# Altium PCB PCB_prototype.PcbDoc
Units mm, origin at the board's own origin, x right, y up, seen from the top; angles counter-clockwise.
Board outline 35.05 x 27.18 mm, 2 copper layers (Top Layer, Bottom Layer); 4 components, 15 nets, 110 pads, 0 vias.
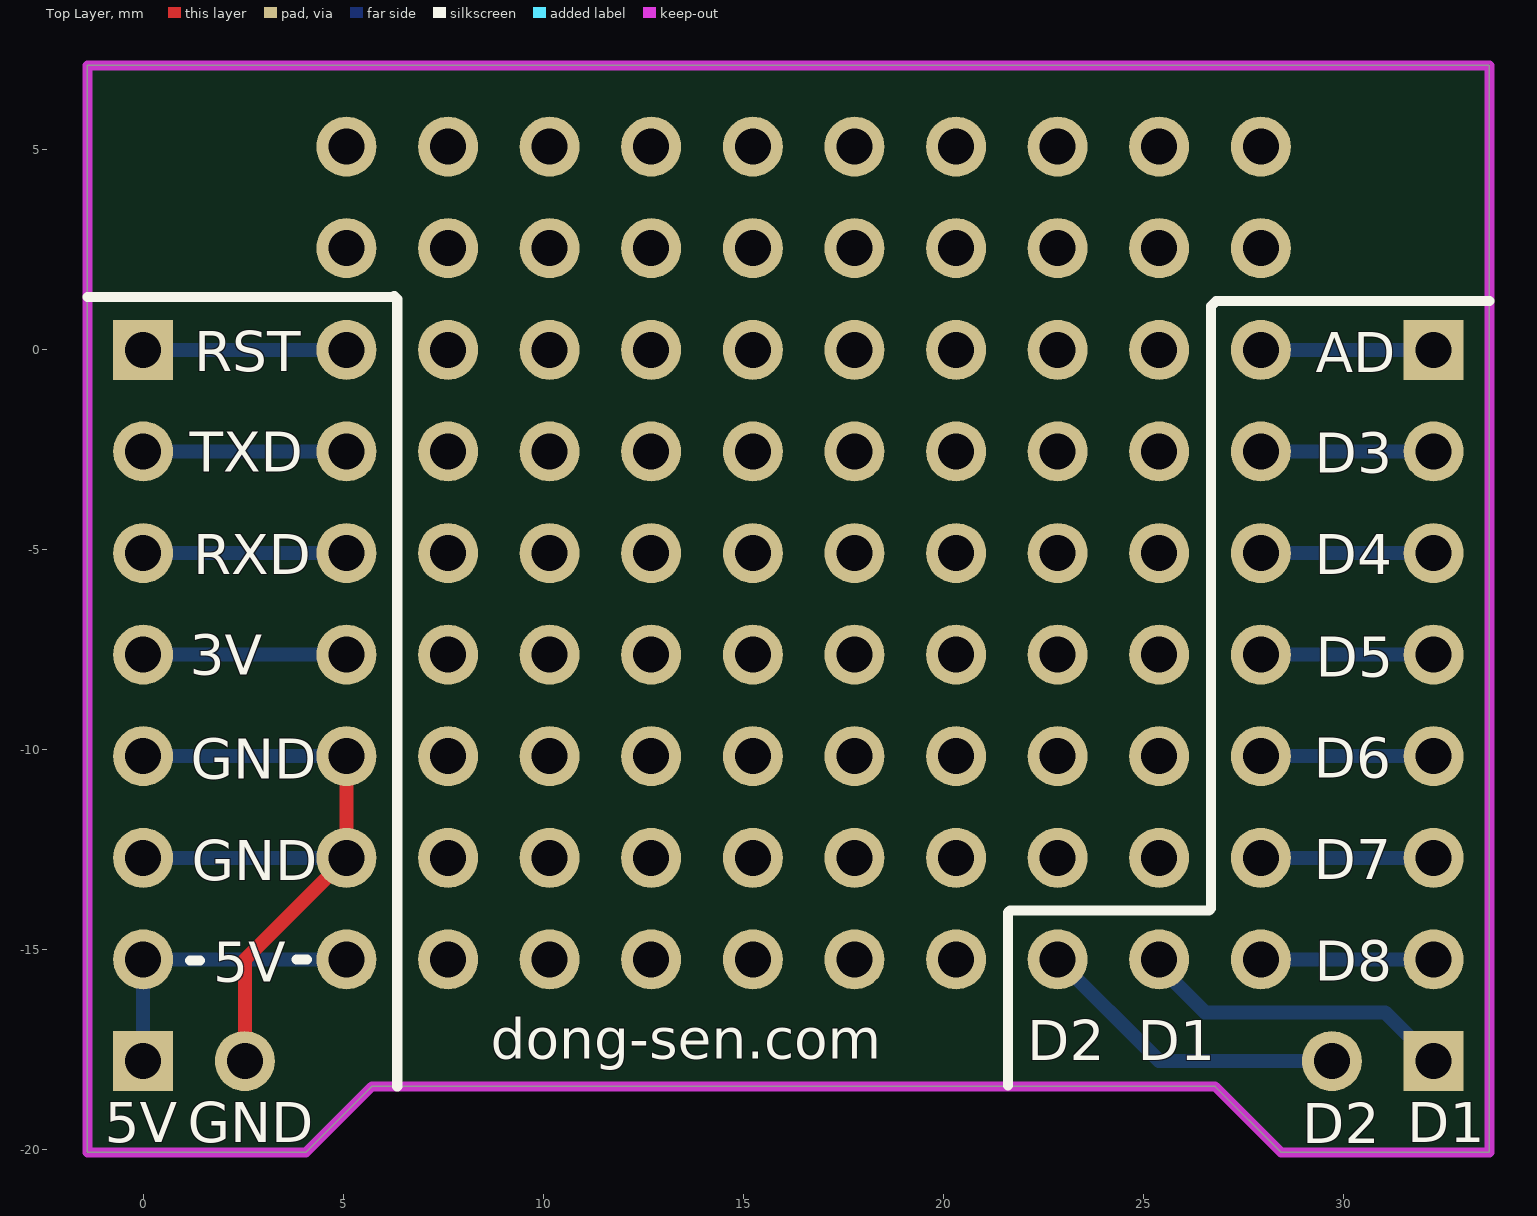
[diagram p0: Top Layer view]
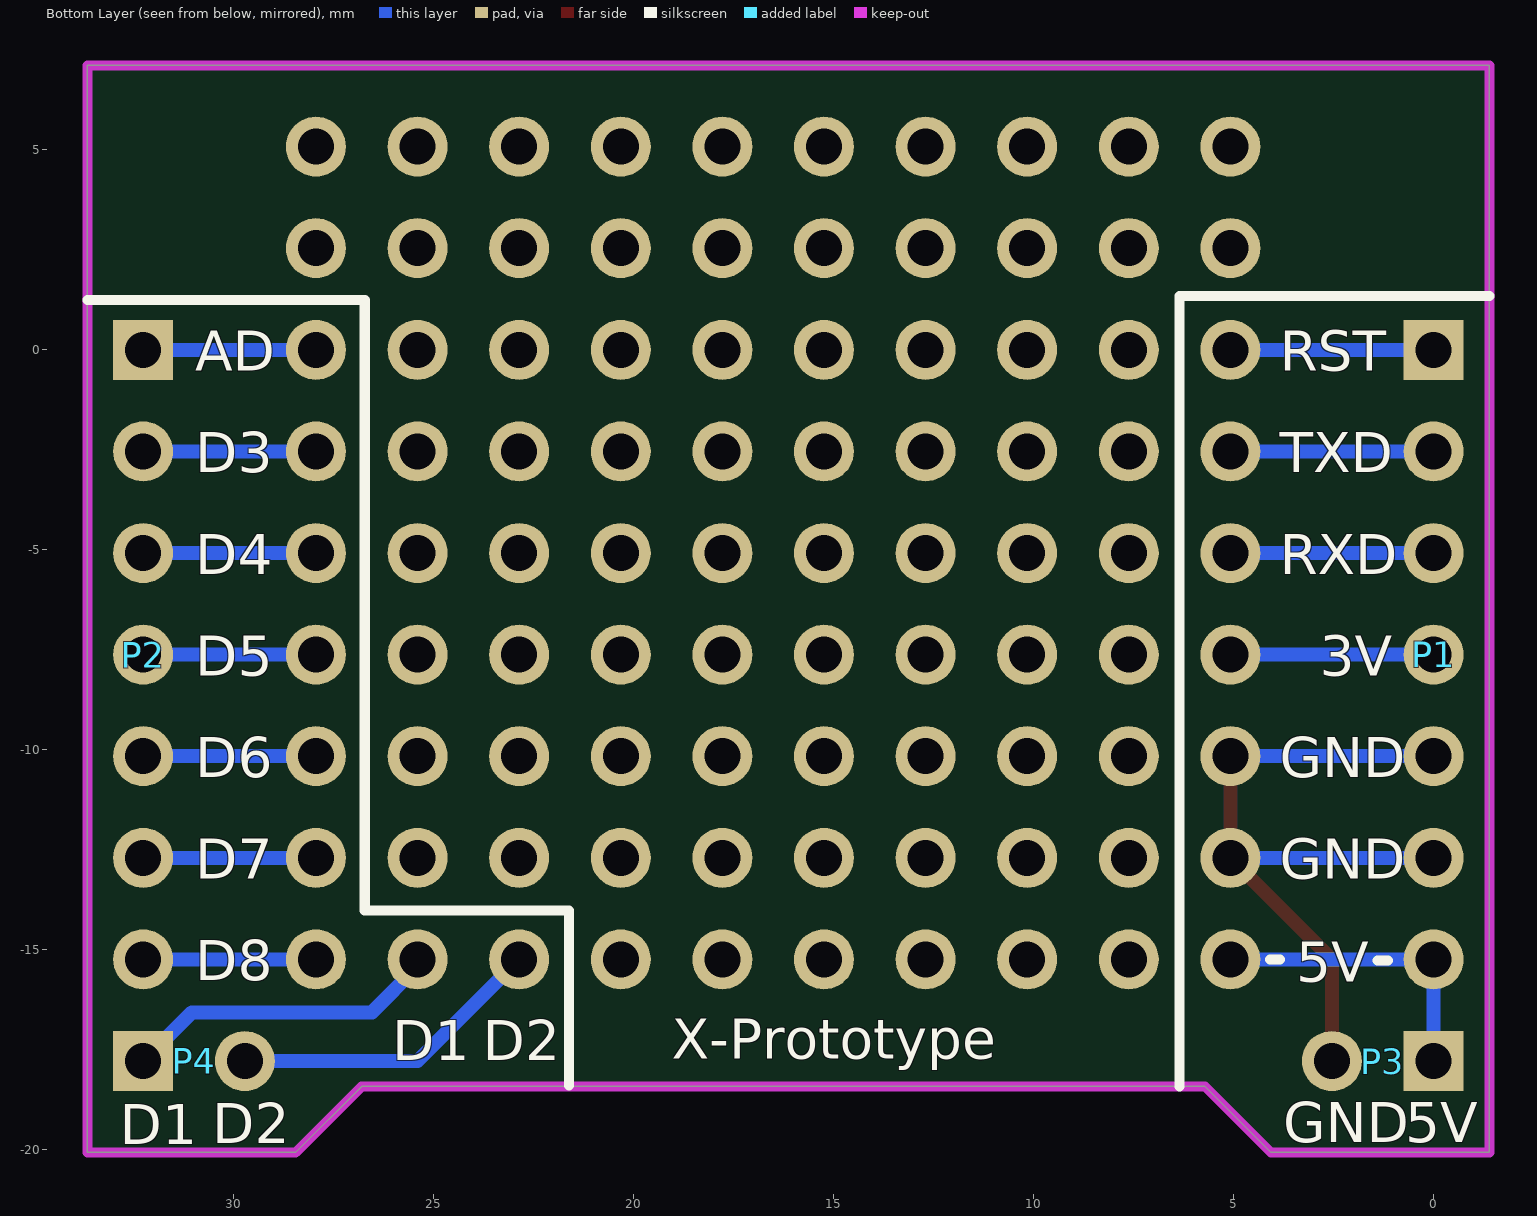
[diagram p1: Bottom Layer view, seen from below]

## Layer stack, top to bottom
Top Solder: solder mask 0.0102, Solder Resist, Dk 3.5
Top Layer: signal copper 0.0356
Dielectric 1: dielectric 0.32, FR-4, Dk 4.8
Bottom Layer: signal copper 0.0356
Bottom Solder: solder mask 0.0102, Solder Resist, Dk 3.5

## Board outline
-1.397,-20.066 -1.397,7.112 33.655,7.112 33.655,-20.066 28.448,-20.066 26.797,-18.415 5.715,-18.415 4.064,-20.066

## Design rules (kind name [scope] priority, off if disabled: settings)
Clearance [All] p1: gap=0.254
PolygonConnect [All] p1: connectstyle=Relief reliefconductorwidth=0.254 reliefentries=4 polygonreliefangle="90 Angle" airgapwidth=0.254
RoutingVias [All] p1: holewidth=0.711 width=1.27 viastyle="Through Hole" minholewidth=0.711 minwidth=1.27 maxholewidth=0.711 maxwidth=1.27
SolderMaskExpansion [All] p1: expansion=0.102
Width [All] p1: maxlimit=5 minlimit=0.254 preferedwidth=0.254
30 further rules are at their usual default settings.

## Components (designator, comment, footprint, x,y, rotation, side; value= is the part's Value field where it differs from the comment)
P1 "Header 7" HDR1X7 0,0 r270 bottom
P2 "Header 7" HDR1X7 32.258,0 r270 bottom
P3 "Header 2" HDR1X2 0,-17.78 r0 bottom
P4 "Header 2" HDR1X2 32.258,-17.78 r180 bottom

## Footprints (in the part's own frame and the unit in brackets; to place one, negate y for a bottom-side part, rotate by r counter-clockwise, add the part's x,y. Pads: shape width x height; smd on the part's side, far side on the other; paste and mask are expansions set on the pad)
HDR1X2 [mm] "Connector; Header; 2 Position"
  rect 1.5x1.5 hole 0.9: 1(0,0)
  round 1.5 hole 0.9: 2(2.54,0)
HDR1X7 [mm] "Connector; Header; 7 Position"
  rect 1.5x1.5 hole 0.9: 1(0,0)
  round 1.5 hole 0.9: 2(2.54,0) 3(5.08,0) 4(7.62,0) 5(10.16,0) 6(12.7,0) 7(15.24,0)

## Part data
P1 P2: library part "Header 2", "Header, 2-Pin"
P3 P4: library part "Header 7", "Header, 7-Pin"

## Free pads (board coordinates)
  round 1.5 hole 0.9: 0(5.08,5.08) 1(5.08,2.54) 2(5.08,0) 3(5.08,-2.54) 4(5.08,-5.08) 5(5.08,-7.62) 6(5.08,-10.16) 7(5.08,-12.7) 8(5.08,-15.24) 9(7.62,-15.24) 10(10.16,-15.24) 11(12.7,-15.24) 12(15.24,-15.24) 13(17.78,-15.24) 14(20.32,-15.24) 15(22.86,-15.24) 16(25.4,-15.24) 17(27.94,-15.24) 18(27.94,-12.7) 19(27.94,-10.16) 20(27.94,-7.62) 21(27.94,-5.08) 22(27.94,-2.54) 23(27.94,0) 24(27.94,2.54) 25(27.94,5.08) 26(25.4,5.08) 27(22.86,5.08) 28(20.32,5.08) 29(17.78,5.08) 30(15.24,5.08) 31(12.7,5.08) 32(10.16,5.08) 33(7.62,5.08) 34(7.62,2.54) 35(7.62,0) 36(7.62,-2.54) 37(7.62,-5.08) 38(7.62,-7.62) 39(7.62,-10.16) 40(7.62,-12.7) 41(10.16,-12.7) 42(12.7,-12.7) 43(15.24,-12.7) 44(17.78,-12.7) 45(20.32,-12.7) 46(22.86,-12.7) 47(25.4,-12.7) 48(25.4,-10.16) 49(25.4,-7.62) 50(25.4,-5.08) 51(25.4,-2.54) 52(25.4,0) 53(25.4,2.54) 54(22.86,2.54) 55(20.32,2.54) 56(17.78,2.54) 57(15.24,2.54) 58(12.7,2.54) 59(10.16,2.54) 60(10.16,0) 61(10.16,-2.54) 62(10.16,-5.08) 63(10.16,-7.62) 64(10.16,-10.16) 65(12.7,-10.16) 66(15.24,-10.16) 67(17.78,-10.16) 68(20.32,-10.16) 69(22.86,-10.16) 70(22.86,-7.62) 71(22.86,-5.08) 72(22.86,-2.54) 73(22.86,0) 74(20.32,0) 75(17.78,0) 76(15.24,0) 77(12.7,0) 78(12.7,-2.54) 79(12.7,-5.08) 80(12.7,-7.62) 81(15.24,-7.62) 82(17.78,-7.62) 83(20.32,-7.62) 84(20.32,-5.08) 85(20.32,-2.54) 86(17.78,-2.54) 87(15.24,-2.54) 88(15.24,-5.08) 89(17.78,-5.08)
  round 3 on Keep-Out: ""(1.143,4.572) ""(31.115,4.572)

## Nets (pads, with @x,y where several pads share a name; then routed paths per layer and width w, separated by ;. In a path a pad name is that pad's centre, name@x,y a point inside that pad or via, vN(x,y) a via of type N, cw(c..) or ccw(c..) an arc to the next point about the centre after c; other vN are vias at no path point)
3V: P1.4 pad.5 | length 5.1
  Bottom Layer w0.35: P1.4 pad.5
5V: P1.7 P3.1 pad.8 | length 7.6
  Bottom Layer w0.35: P3.1 P1.7 pad.8
AD: P2.1 pad.23 | length 4.3
  Bottom Layer w0.35: pad.23 P2.1
D3: P2.2 pad.22 | length 4.3
  Bottom Layer w0.35: pad.22 P2.2
D4: P2.3 pad.21 | length 4.3
  Bottom Layer w0.35: pad.21 P2.3
D5: P2.4 pad.20 | length 4.3
  Bottom Layer w0.35: pad.20 P2.4
D6: P2.5 pad.19 | length 4.3
  Bottom Layer w0.35: pad.19 P2.5
D7: P2.6 pad.18 | length 4.3
  Bottom Layer w0.35: pad.18 P2.6
D8: P2.7 pad.17 | length 4.3
  Bottom Layer w0.35: pad.17 P2.7
GND: P1.5 P1.6 P3.2 pad.6 pad.7 | length 18.8
  Top Layer w0.35: P3.2 2.54,-15.24 pad.7 pad.6
  Bottom Layer w0.35: P1.6 pad.7 ; P1.5 pad.6
RST: P1.1 pad.2 | length 5.1
  Bottom Layer w0.35: P1.1 pad.2
RXD: P1.3 pad.4 | length 5.1
  Bottom Layer w0.35: P1.3 pad.4
SCL: P4.2 pad.15 | length 7.9
  Bottom Layer w0.35: pad.15 25.4,-17.78 P4.2
SDA: P4.1 pad.16 | length 8
  Bottom Layer w0.35: pad.16 25.4,-15.418 26.543,-16.561 31.039,-16.561 P4.1
TXD: P1.2 pad.3 | length 5.1
  Bottom Layer w0.35: P1.2 pad.3

## Keep-outs
Keep-Out Layer:
  the board outline again, w0.254

## Silkscreen, mask and mechanical layers (free items; w line width, h text height)
Top Overlay:
  lines w0.254: -1.397,1.321 6.299,1.321 6.35,1.27 ; 1.168,-15.265 1.422,-15.265 ; 3.835,-15.24 4.089,-15.24 ; 6.274,1.346 6.35,1.27 ; 6.35,-18.415 6.35,1.27 ; 21.615,-18.39 21.615,-14.072 21.666,-14.021 26.645,-14.021 26.695,-13.97 26.695,1.092 26.822,1.219 33.655,1.219
  text "RST" at 1.27,-0.533 h1
  text "AD" at 29.312,-0.559 h1
  text "TXD" at 1.168,-3.048 h1
  text "D3" at 29.286,-3.073 h1
  text "RXD" at 1.245,-5.613 h1
  text "D4" at 29.286,-5.613 h1
  text "3V" at 1.168,-8.128 h1
  text "D5" at 29.312,-8.179 h1
  text "D6" at 29.261,-10.693 h1
  text "GND" at 1.194,-10.719 h1
  text "D7" at 29.261,-13.233 h1
  text "GND" at 1.219,-13.259 h1
  text "D8" at 29.286,-15.773 h1
  text "5V" at 1.753,-15.799 h1
  text "dong-sen.com" at 8.687,-17.729 h1
  text "D2" at 22.098,-17.755 h1
  text "D1" at 24.867,-17.755 h1
  text "5V" at -0.965,-19.812 h1
  text "GND" at 1.118,-19.812 h1
  text "D1" at 31.598,-19.812 h1
  text "D2" at 28.981,-19.837 h1
Bottom Overlay:
  lines w0.254: -1.397,1.346 6.35,1.346 6.35,-18.415 ; 1.143,-15.265 1.397,-15.265 ; 3.835,-15.24 4.089,-15.24 ; 21.615,-18.39 21.615,-14.021 26.721,-14.021 26.721,1.245 33.655,1.245
  text "RST" at 3.848,-0.525 h1
  text "AD" at 30.963,-0.525 h1
  text "TXD" at 3.848,-3.065 h1
  text "D3" at 30.963,-3.065 h1
  text "RXD" at 3.848,-5.605 h1
  text "D4" at 30.963,-5.605 h1
  text "3V" at 2.848,-8.145 h1
  text "D5" at 30.963,-8.145 h1
  text "GND" at 3.848,-10.685 h1
  text "D6" at 30.963,-10.685 h1
  text "GND" at 3.848,-13.225 h1
  text "D7" at 30.963,-13.225 h1
  text "D8" at 30.963,-15.765 h1
  text "5V" at 3.429,-15.799 h1
  text "X-Prototype" at 19.05,-17.729 h1
  text "D2" at 23.774,-17.755 h1
  text "D1" at 26.035,-17.755 h1
  text "5V" at 0.711,-19.812 h1
  text "GND" at 3.759,-19.812 h1
  text "D2" at 30.531,-19.837 h1
  text "D1" at 32.842,-19.863 h1